# Altium PCB MB1814.PcbDoc (part 6 of 6)
Units mm, origin at the board's own origin, x right, y up, seen from the top; angles counter-clockwise.
Board outline 70 x 82.5 mm, 4 copper layers (Top Layer, Signal Layer 1, Signal Layer 2, Bottom Layer), stack 1.614 mm thick; 207 components, 155 nets, 901 pads, 710 vias.
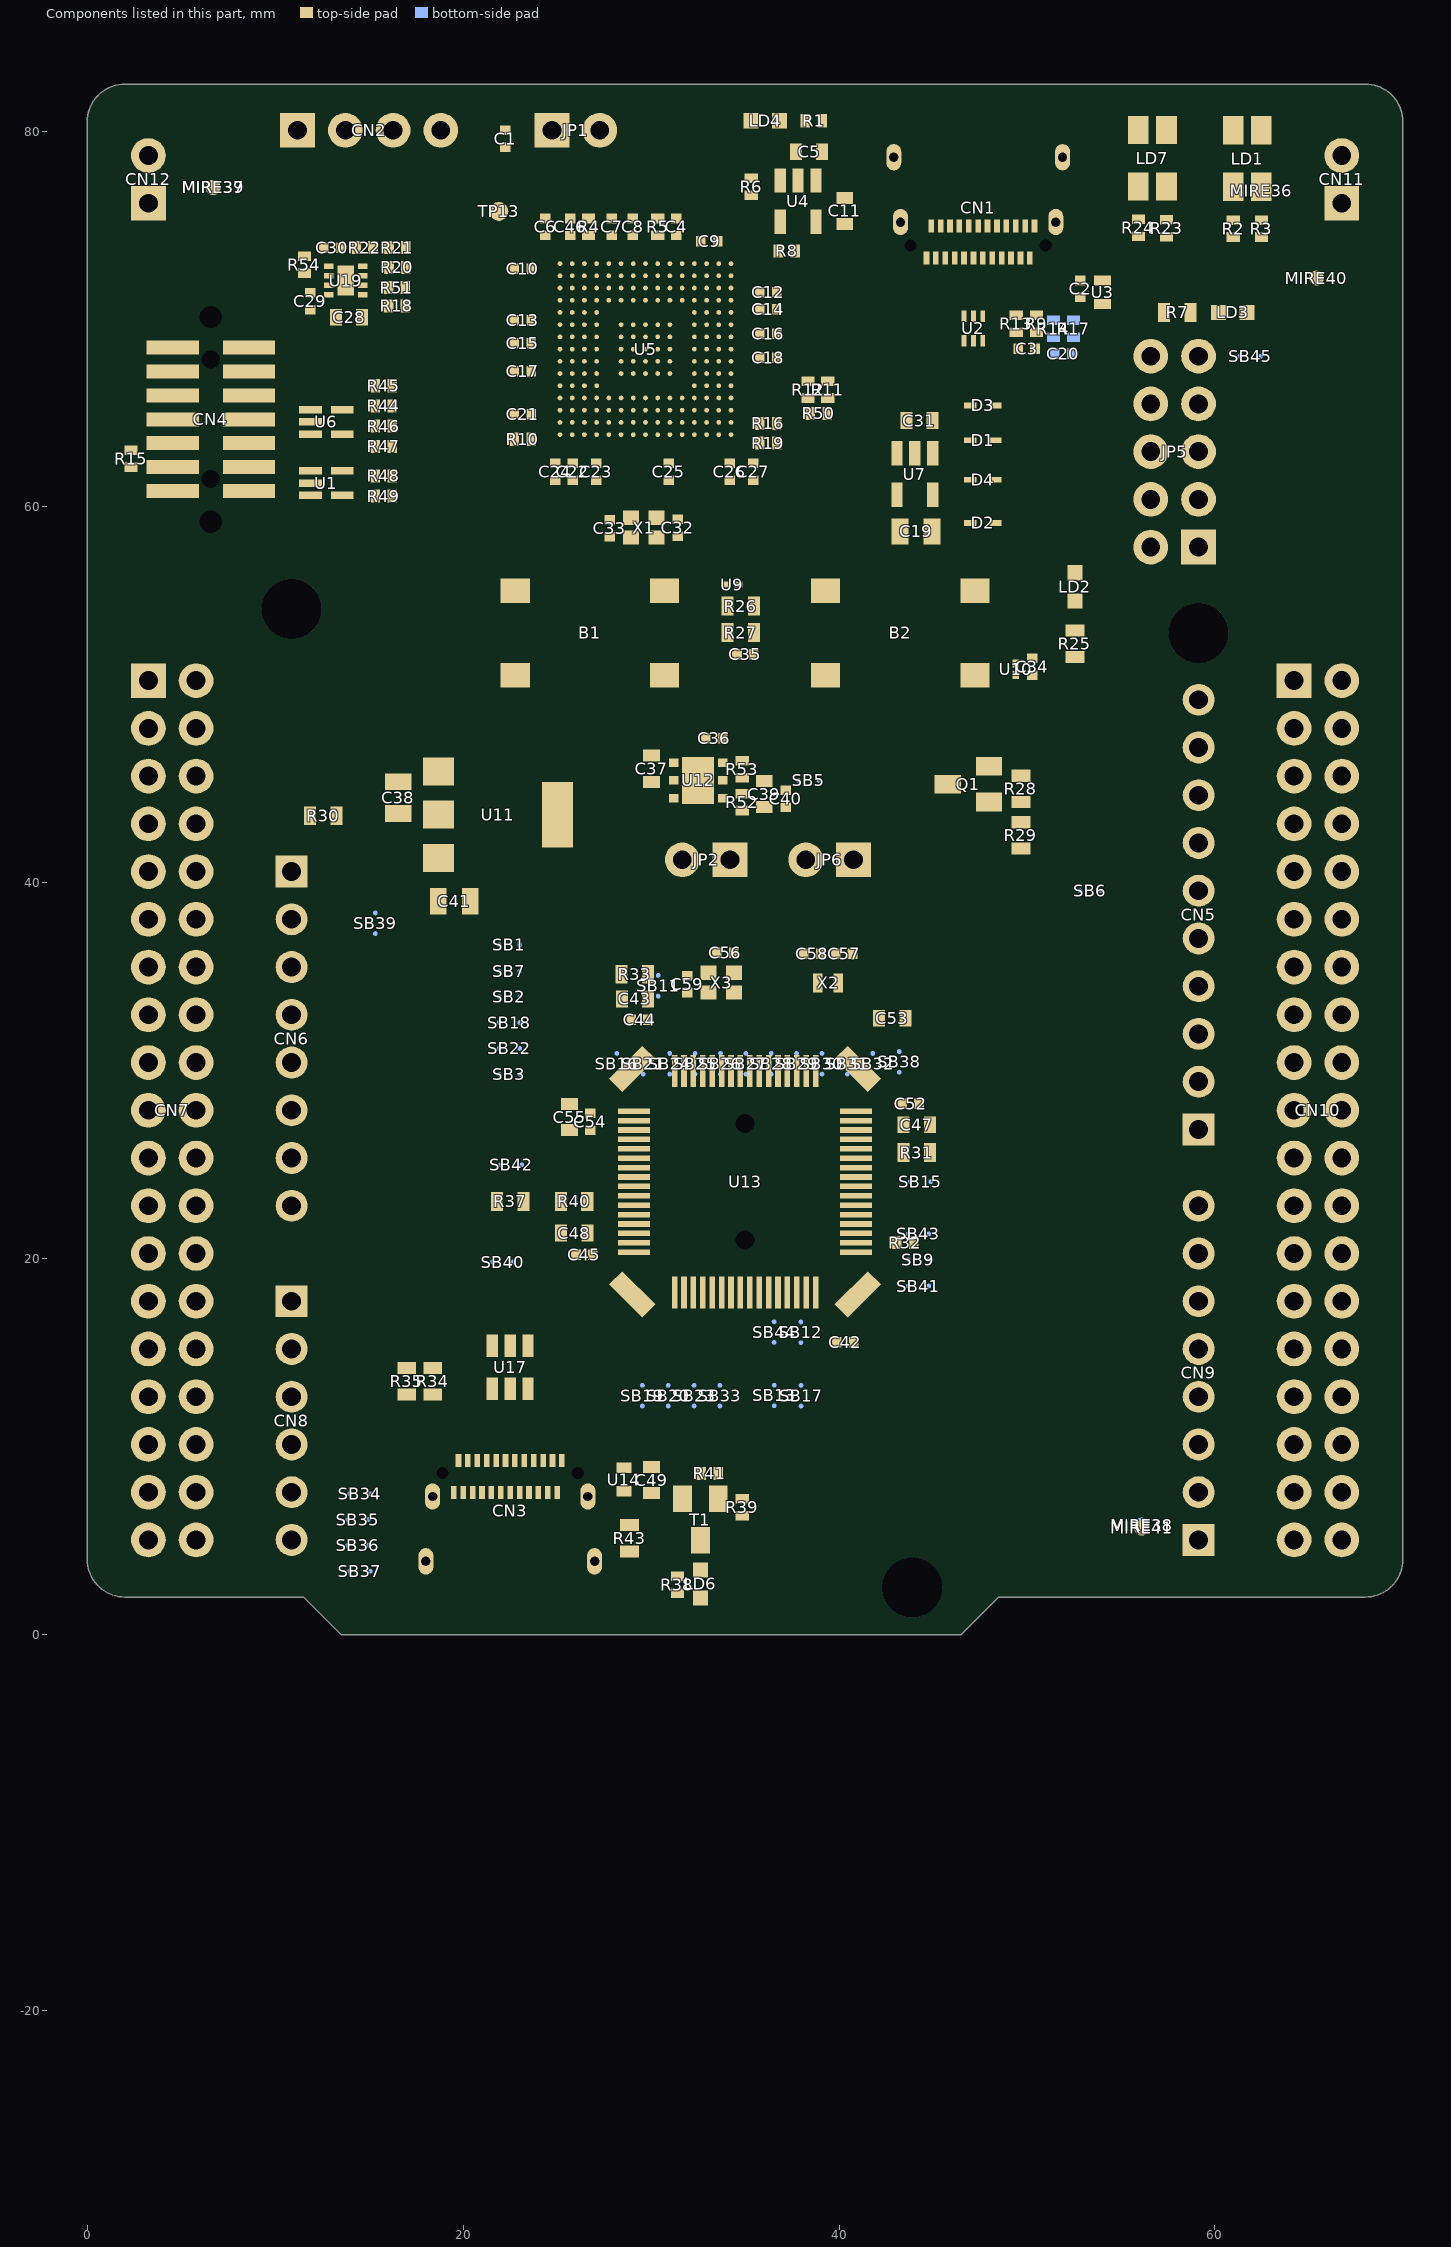
[diagram p6: the components of this part, seen from the top]

## Via types
v1: diameter 0.45, hole 0.2, Top Layer to Bottom Layer, tented both sides, 696 vias
v2: diameter 0.45, hole 0.2, Top Layer to Bottom Layer, 14 vias

## Nets (pads, with @x,y where several pads share a name; then routed paths per layer and width w, separated by ;. In a path a pad name is that pad's centre, name@x,y a point inside that pad or via, vN(x,y) a via of type N, cw(c..) or ccw(c..) an arc to the next point about the centre after c; other vN are vias at no path point) (continued)
pads on no net: CN1.0 CN1.A2 CN1.A3 CN1.A8 CN1.A10 CN1.A11 CN1.B2 CN1.B3 CN1.B8 CN1.B10 CN1.B11 CN3.0 CN3.A2 CN3.A3 CN3.A8 CN3.A10 CN3.A11 CN3.B2 CN3.B3 CN3.B8 CN3.B10 CN3.B11 CN4.0 CN4.1 CN4.2 CN4.9 CN7.9 CN7.10 CN7.11 CN7.21 CN7.26 CN10.1 CN10.10 CN10.18 CN10.24 CN10.38 MIRE36.1 MIRE37.1 MIRE38.1 MIRE39.1 MIRE40.1 MIRE41.1 U1.4 U2.4 U5.A1 U5.A2 U5.A3 U5.A4 U5.A5 U5.A8 U5.A9 U5.A11 U5.A12 U5.A13 U5.B1 U5.B2 U5.B3 U5.B4 U5.B5 U5.B6 U5.B7 U5.B8 U5.B9 U5.B10 U5.B11 U5.B12 U5.B14 U5.B15 U5.C2 U5.C3 U5.C4 U5.C12 U5.C13 U5.C14 U5.C15 U5.D1 U5.D2 U5.D3 U5.D11 U5.D13 U5.D14 U5.E1 U5.E2 U5.E3 U5.E4 U5.E12 U5.E13 U5.E14 U5.E15 U5.F1 U5.F4 U5.F14 U5.G4 U5.G14 U5.G15 U5.H2 U5.H3 U5.H4 U5.H14 U5.J2 U5.J3 U5.J4 U5.K1 U5.K2 U5.K3 U5.K12 U5.K13 U5.K14 U5.K15 U5.L1 U5.L12 U5.L13 U5.L14 U5.L15 U5.M2 U5.M3 U5.M4 U5.M7 U5.M12 U5.M13 U5.M14 U5.M15 U5.N2 U5.N4 U5.N6 U5.N7 U5.N11 U5.N13 U5.N14 U5.N15 U5.P2 U5.P4 U5.P5 U5.P6 U5.P7 U5.P8 U5.P9 U5.P10 U5.P11 U5.P12 U5.P13 U5.P14 U5.P15 U5.R2 U5.R3 U5.R6 U5.R7 U5.R8 U5.R9 U5.R10 U5.R11 U5.R12 U5.R13 U7.4 U12.3 U13.0 U17.5
copper on no net:
  other v1: 14.141,45.084

## Polygon pours and split planes (outlines as drawn)
GND on Top Layer "GND" (solid, remove dead copper, pour order 140): 68.35,84.554 70.075,82.829 70.075,2.304 66.75,-1.021 0.825,-1.021 -1.925,1.729 -1.925,82.229 0.4,84.554
5V_STLK on Top Layer "5V_STLK_L01_P112" (solid, remove dead copper, pour order 112): 40.2,77.623 39.601,77.024 39.077,76.5 38.391,76.5 38.325,76.566 38.325,79.283 38.582,79.54 40.2,79.54
NetC39_2 on Top Layer "NO_FT" (solid, pour order 127): 33.3,43.9 33.85,43.35 38.475,43.35 38.75,43.625 38.75,44.35 38.375,44.725 34.45,44.725 34.225,44.95 33.375,44.95 33.3,44.875
no net on Top Layer "NO_FT" (solid, pour order 113): 37.05,6.475 37.25,6.675 37.25,8.05 36.975,8.325 35.8,8.325 35.425,7.95 35.425,6.6 35.55,6.475
5V_VIN on Top Layer "5V_VIN" (solid, remove dead copper, pour order 138): 60.35,61.7 60.825,61.225 60.825,59.375 60.077,58.627 56.452,58.627 56.1,58.275 47.875,58.275 47.65,58.5 47.65,59.65 48.175,60.175 56.9,60.175 58.425,61.7
E5V on Top Layer "E5V_L01_P137" (solid, remove dead copper, pour order 137): 60.875,62.475 60.225,61.825 58.275,61.825 56.75,60.3 48.4,60.3 47.8,60.9 47.8,61.975 48.35,62.525 56.525,62.525 58.475,64.475 60.575,64.475 60.875,64.175
VBUS_STLK on Top Layer "VBUS_STLK_L01_P136" (solid, remove dead copper, pour order 136): 48.075,64.525 47.8,64.25 47.8,63.2 48.2,62.8 56.375,62.8 58.325,64.75 60.55,64.75 60.875,65.075 60.875,66.775 60.725,66.925 58.7,66.925 56.825,65.05 54.425,65.05 53.9,64.525
VBUS_STLK on Top Layer "VBUS_STLK" (solid, remove dead copper, pour order 132): 13.15,71.8 13.15,71.15 12.95,70.95 10.85,70.95 10.8,71 10.8,71.825 11.025,72.05 13.075,72.05 13.15,71.975
5V_STLK on Top Layer "5V_STLK" (solid, remove dead copper, pour order 131): 14.325,71.575 14.975,71.575 15.25,71.3 15.25,69.125 15.125,69 14.028,69 13.951,69.077 13.951,70.776 14.25,71.075 14.25,71.5
VBUS_STLK on Top Layer "VBUS_STLK" (solid, remove dead copper, pour order 130): 38.267,76.02 39.28,76.02 39.7,75.6 41.525,75.6 41.775,75.35 41.775,74.325 41.325,73.875 38.46,73.875 38.166,74.169 38.166,75.919
5V on Top Layer "5V_L01_P032" (solid, remove dead copper, pour order 32): 59.775,69.638 58.463,69.638 56.575,67.75 54.65,67.75 53.625,66.725 49.675,66.725 49.2,66.25 39.175,66.25 39.025,66.4 39.025,67.625 39.175,67.775 48.2,67.775 49.425,69 50.175,69 53.075,71.9 59.525,71.9 59.775,71.65
3V3_STLK on Top Layer "3V3_STLK" (solid, remove dead copper, pour order 129): 45.525,65.875 45.825,65.575 45.825,62.688 45.262,62.125 44.675,62.125 44.455,62.345 44.455,65.755 44.575,65.875
NetC19_2 on Top Layer "NetC19_2" (solid, remove dead copper, pour order 128): 47.259,66.025 47.448,65.836 47.448,58.223 47.05,57.825 44.38,57.825 44.175,58.03 44.175,60.975 43.6,61.55 42.9,61.55 42.425,62.025 42.425,63.545 42.58,63.7 43.425,63.7 43.55,63.575 43.55,62.299 43.903,61.946 45.371,61.946 46.05,62.625 46.05,65.9 46.175,66.025
5V on Top Layer "NO_FT" (solid, pour order 121): 34.6,46.875 33.863,46.875 33.4,47.4 33.4,48.1 33.5,48.2 34.6,48.2 34.849,47.951 34.849,47.124
GND on Top Layer "NO_FT" (solid, remove dead copper, pour order 8): 20.625,45.025 20.35,44.75 16.15,44.75 15.875,45.025 15.875,48.2 16.275,48.6 20.275,48.6 20.625,48.25
5V_VIN on Top Layer "NO_FT" (solid, remove dead copper, pour order 6): 12.725,42.375 12.35,42.75 12.35,44.025 12.825,44.5 16.3,44.5 20.4,44.5 21,45.1 21,46.925 21.425,47.35 26.8,47.35 27.3,46.85 27.3,40.7 26.725,40.125 21.7,40.125 21.225,40.6 21.225,41.825 20.675,42.375
VBUSC on Top Layer "VBUSC_L01_P078" (solid, remove dead copper, pour order 78): 49.5,66.375 49.25,66.125 48.1,66.125 47.8,65.825 47.8,65.1 48.1,64.8 53.775,64.8 54.392,65.417 56.592,65.417 58.3,67.125 60.65,67.125 60.9,67.375 60.9,69.25 60.725,69.425 58.775,69.425 56.725,67.375 54.575,67.375 53.75,66.55 49.675,66.55
VIN on Top Layer "NO_FT" (solid, remove dead copper, pour order 28): 20.5,42.125 20.625,42 20.625,38.025 20.35,37.75 17.1,37.75 16.75,38.1 16.75,41.85 17.025,42.125
GND on Bottom Layer "GND" (solid, remove dead copper, pour order 141): 68.45,84.375 70.175,82.65 70.175,2.125 66.85,-1.2 0.925,-1.2 -1.825,1.55 -1.825,82.05 0.5,84.375
5V_STLK on Bottom Layer "Bottom Layer-5V_STLK" (solid, remove dead copper, pour order 14): 39.6,78 41.85,75.75 52.9,75.75 58.25,70.4 63.175,70.4 64.225,69.35 64.225,62.5 61.575,59.85 58.999,59.85 58.5,59.351 58.5,56.5 58.725,56.275 65.3,56.275 67.975,58.95 67.975,69.625 63.95,73.65 63.936,73.65 59.536,78.05 42.75,78.05 41.6,79.2 39.8,79.2 39.6,79
VBUS_STLK on Bottom Layer "VDDIO1_4_L01_P-001" (solid, remove dead copper, pour order 34): 41.5,81.2 38.5,81.2 37.15,79.85 37.15,74.9 38.25,73.8 41.45,73.8 41.7,74.05 41.7,75.65 39.4,77.95 39.4,79 39.8,79.4 40.9,79.4 41.5,80
NetC49_2 on Bottom Layer "USB_VBUS" (solid, remove dead copper, pour order 126): 44.125,9.075 44.125,8.25 41.675,5.8 34.51,5.8 33.435,6.875 28.55,6.875 27.325,8.1 27.325,9.1 27.585,9.36 33.728,9.36 34.246,8.842 34.246,8.241 35.056,7.431 38.806,7.431 40.675,9.3 43.9,9.3
no net on Bottom Layer "NO_FT" (solid, pour order 80): 34.45,9.375 34.525,9.45 35.85,9.45 36.975,8.325 36.975,7.75 36.8,7.575 35.2,7.575 34.45,8.325
5V_VIN on Bottom Layer "5V_VIN" (solid, remove dead copper, pour order 133): 49.8,60.175 49.525,59.9 49.525,58.475 49.75,58.275 56.1,58.275 56.452,58.627 60.077,58.627 60.825,59.375 60.825,61.225 60.35,61.7 58.425,61.7 56.9,60.175
E5V on Bottom Layer "E5V_L04_P040" (solid, remove dead copper, pour order 40): 49.75,62.525 49.45,62.225 49.45,60.6 49.775,60.3 56.75,60.3 58.275,61.825 60.225,61.825 60.875,62.475 60.875,64.175 60.575,64.475 58.475,64.475 56.525,62.525
VBUS_STLK on Bottom Layer "VBUS_STLK_L04_P038" (solid, remove dead copper, pour order 38): 49.7,64.525 49.4,64.225 49.4,63.075 49.7,62.8 56.375,62.8 58.325,64.75 60.55,64.75 60.875,65.075 60.875,66.775 60.725,66.925 58.7,66.925 56.825,65.05 54.425,65.05 53.9,64.525
NetC49_2 on Bottom Layer "USB_VBUSC" (solid, remove dead copper, pour order 139): 62.325,68.525 62.575,68.775 63.975,68.775 64.05,68.7 64.05,67.6 63.8,67.35 62.5,67.35 62.325,67.525
3V3_STLK on Bottom Layer "3V3_STLK" (solid, remove dead copper, pour order 134): 10.225,80.95 20.625,80.95 24.505,77.07 24.505,74.332 23.963,73.79 22.71,73.79 21.225,75.275 21.225,76.154 19.779,77.6 10.275,77.6 9.55,78.325 9.55,80.275
3V3 on Bottom Layer "3V3_L04_P124" (solid, remove dead copper, pour order 124): 2.95,69.3 2.195,68.545 2.195,66.83 3.612,65.413 3.612,59.862 1.225,57.475 1.225,32.625 1.85,32 11.3,32 11.3,32.025 11.875,32.6 11.875,58 9.675,60.2 9.675,68.65 9.025,69.3
3V3 on Bottom Layer "3V3_L04_P110" (solid, remove dead copper, pour order 110): 38.625,54.825 39.35,54.1 53.575,54.1 54.8,52.875 54.8,50.7 53.95,49.85 43.575,49.85 42.15,48.425 42.15,39.95 41.275,39.075 39.25,39.075 38.625,39.7 36.437,41.887 36.437,58.337 36.5,58.4 36.5,63.4 36.875,63.775 38.3,63.775 38.625,63.45
NetC39_2 on Bottom Layer "NO_FT" (solid, pour order 36): 38.05,44.8 38.35,44.5 38.65,44.5 38.95,44.2 38.95,43.825 38.675,43.55 36.95,43.55 36.437,44.063 36.437,45.975 37.9,45.975 38.05,45.825
5V_VIN on Bottom Layer "5V_VIN_L04_P108" (solid, remove dead copper, pour order 108): 21.5,47.5 20.375,46.375 20.375,40.47 20.72,40.125 26.575,40.125 26.92,40.47 26.92,47.23 26.65,47.5
GND on Signal Layer 2 "GND" (solid, remove dead copper, pour order 125): 68.45,84.375 70.175,82.65 70.175,2.125 66.85,-1.2 0.925,-1.2 -1.825,1.55 -1.825,82.05 0.5,84.375
3V3_STLK on Signal Layer 2 "3V3_STLK_L03_P020" (solid, remove dead copper, pour order 20): 33.025,74.925 32.6,75.35 23.7,75.35 21.675,73.325 21.65,63.575 23.75,61.475 36.05,61.475 36.35,61.775 36.35,63.475 36.8,64 44.7,64 46.075,65.375 46.075,68 42.9,71.175 40.825,71.175 40.075,71.925 40.075,75.6 43.15,78.675 59.754,78.675 60.174,79.095 60.174,80.963 59.762,81.375 40.075,81.375 37.125,78.425 37.125,72.65 36.025,71.55 35.2,71.55 34.025,72.725 33.425,72.725 33.025,73.125
VBUS_STLK on Signal Layer 2 "VBUS_STLK_L03_P024" (solid, remove dead copper, pour order 24): 60.975,65 61.55,65.575 61.55,68.85 62.325,69.625 63.9,69.625 64.675,68.85 64.675,65 64.675,42.7 65.825,41.55 68.275,41.55 68.875,42.15 68.875,71.45 61.8,78.525 43.4,78.525 40.25,75.375 40.25,72 40.875,71.375 43.025,71.375 49.375,65.025 49.375,62.875 49.5,62.75 52.1,62.75 52.375,63.025 52.375,70.275 52.75,70.65 57.575,70.65 58,70.225 58,65
NetC49_2 on Signal Layer 2 "USB_VBUS" (solid, pour order 115): 20.8,5.15 19.225,5.15 16.925,7.45 16.925,19.5 18.5,19.5 28.5,9.5 31.45,9.5 35.175,5.775 35.175,5.575 34.75,5.15
5V on Signal Layer 2 "5V_L03_P030" (solid, remove dead copper, pour order 30): 40.075,3.7 40.075,4.05 39.1,5.025 39.1,10.175 43,14.075 43,23.875 45.65,26.525 45.65,40.825 43.625,42.9 30.25,42.9 29.45,43.7 29.45,47.225 30.575,48.35 51.75,48.35 52.925,49.525 52.925,70.025 52.9,70.05 53.1,70.25 57.325,70.25 57.625,69.95 57.625,69.25 57.62,68.575 58.15,68.025 58.15,55.775 56.975,54.6 56.975,36.625 53.725,33.375 53.725,19.65 42.8,8.725 42.8,4.05 39.925,1.175 16.875,1.175 12.5,5.55 12.5,26.725 10.5,28.725 5.325,28.725 4.825,29.225 4.825,31.125 5.727,32.027 13.958,32.027 16.8,29.185 16.8,7.325 19.1,5.025 29.275,5.025 31.775,2.525 38.9,2.525
VDD_MCU on Signal Layer 2 "VDD_MCU" (solid, pour order 116): 28.325,39 28.325,28.075 27.54,27.29 25.79,27.29 25.075,26.575 25.075,21.9 32.475,14.5 40.15,14.5 40.55,14.9 40.55,24.775 43.2,27.425 43.2,29.035 42.71,29.525 36.6,29.525 33.275,32.85 33.275,42.183 32.862,42.595 31.92,42.595
3V3 on Signal Layer 2 "3V3" (solid, pour order 119): 29.976,5.025 29.876,4.925 29.876,3.302 30.653,2.525 38.694,2.525 38.975,2.806 38.975,3.35 37.75,4.575 37.75,7.275 35.4,9.625 35.4,14.3 32.675,14.3 24.9,22.075 24.9,31.375 18.775,37.5 14.925,37.5 11.675,34.25 5.51,34.25 4.7,33.44 4.7,32.325 4.975,32.05 14.025,32.05 17,29.075 17,21.5 28.8,9.7 31.6,9.7 35.4,5.9 35.4,5.5 34.925,5.025
E5V on Signal Layer 2 "E5V_L03_P062" (solid, remove dead copper, pour order 62): 49.474,60.399 52.099,60.399 52.325,60.625 52.325,62.325 52.1,62.55 45.425,62.55 37.275,54.4 25.25,54.4 24.625,53.775 24.625,50.85 24.025,50.25 8.225,50.25 4.625,46.65 4.625,44 6.225,42.4 13.025,42.4 15.925,45.3 18.375,45.3 20.625,47.55 24,47.55 27.95,51.5 40.575,51.5
NetC49_2 on Signal Layer 2 "USB_VBUS" (solid, remove dead copper, pour order 122): 64.113,69.287 63.95,69.45 62.35,69.45 61.675,68.775 61.675,65.35 61.075,64.75 58.294,64.75 58.294,55.631 57.163,54.5 57.163,36.547 53.912,33.296 53.912,19.637 42.875,8.6 42.875,8.1 60.1,8.1 62.925,10.925 62.925,52.01 64.6,53.685 64.6,68.8
3V3 on Signal Layer 2 "3V3_L03_P052" (solid, remove dead copper, pour order 52): 2.975,69.8 2.25,69.075 2.25,66.875 3.05,66.075 12.475,66.075 23.975,54.575 36.75,54.575 38.625,56.45 38.625,63.5 38.3,63.825 36.925,63.825 36.575,63.475 36.575,58.2 35.05,56.675 26.525,56.675 13.4,69.8
VDD on Signal Layer 2 "VDD" (solid, pour order 117): 40.675,14.76 40.165,14.25 35.575,14.25 35.575,9.725 37.87,7.43 37.87,4.755 39.05,3.575 39.625,3.575 39.875,3.825 39.875,4.15 38.95,5.075 38.95,10.3 42.7,14.05 42.7,23.7 45.425,26.425 45.425,30.4 43.8,32.025 41.05,32.025 39.35,33.725 39.35,42.8 33.071,42.8 33.069,42.389 33.069,33.356 36.69,29.735 42.615,29.735 43.425,28.925 43.425,27.073 40.675,24.323
VDD on Signal Layer 2 "VDD_L03_P058" (solid, remove dead copper, pour order 58): 23.975,50.575 24.025,50.575 24.4,50.95 24.4,53.9 18.575,59.725 1.625,59.725 1.225,59.325 1.225,44.025 3.925,44.025 4.25,44.35 4.25,46.775 8.05,50.575
5V_VIN on Signal Layer 2 "5V_VIN_L03_P016" (solid, remove dead copper, pour order 16): 20.4,47.1 20.4,43.2 20.8,42.8 24.925,42.8 30.663,48.538 51.488,48.538 52.35,49.4 52.35,59.75 52.05,60.05 49.9,60.05 41.2,51.35 28.075,51.35 24.1,47.375 20.675,47.375
VIN on Signal Layer 2 "VIN" (solid, pour order 118): 18.64,37.965 18.025,37.35 14.7,37.35 11.575,34.225 5.775,34.225 4.65,33.1 4.65,25.25 5.45,24.45 12.15,24.45 12.425,24.175 12.425,21.875 11.645,21.095 1.68,21.095 1.2,21.575 1.2,36.01 4.265,39.075 15.575,39.075 16.55,40.05 18.395,40.05 18.64,39.805
GND on Signal Layer 2 "GND_L03_P026" (solid, remove dead copper, pour order 26): 56.825,82.35 58.15,81.025 58.15,79.375 58.6,78.925 62,78.925 69.425,71.5 69.9,71.5 69.9,81.45 69,82.35
GND on Signal Layer 1 "GND" (solid, remove dead copper, pour order 120): 68.45,84.375 70.175,82.65 70.175,2.125 66.85,-1.2 0.925,-1.2 -1.825,1.55 -1.825,82.05 0.5,84.375

## Other copper
Top Layer:
  pour cut-out: 28.4,64.5 28.28,64.38 28.28,60.48 27.73,60.48 26.975,59.725 26.975,57.5 31.925,57.5 32.334,57.909 32.325,57.918 32.325,60.2 30.45,60.2 29.875,60.775 29.875,63.81 29.195,64.49
  text "1" at 46.875,5.2 h2.5
  text ".Layer_Name" at -0.272,-22.558 h3
  text ".GTL" at 41.423,-22.558 h3
Signal Layer 1:
  text "2" at 48.625,5.2 h2.5
  text ".Layer_Name" at -0.272,-22.558 h3
  text ".G1" at 41.423,-22.558 h3
Signal Layer 2:
  text "3" at 51.625,5.2 h2.5
  text ".Layer_Name" at -0.272,-22.558 h3
  text ".G2" at 41.423,-22.558 h3
Bottom Layer:
  text "4" at 53.625,5.2 h2.5
  text ".GBL" at 30.22,-22.59 h3
  text ".Layer_Name" at 71.534,-22.59 h3
Multi-Layer:
  pour cut-out: 46.125,7.4 46.125,4.4 54.625,4.4 54.625,7.4

## Silkscreen, mask and mechanical layers (free items; w line width, h text height)
Top Overlay:
  lines w0.076: 12.394,3.77 14.934,3.77 14.934,9.8 ; 12.394,19.01 14.934,19.01 14.934,12.85 ; 12.394,21.55 16.204,21.55 16.204,25.614 ; 12.394,33.996 16.204,33.996 16.204,31.6
  lines w0.12: 16,1.2 16,5.65 17.425,5.65 17.425,1.2 16,1.2
  text "STLK" at 28.975,80.3 h1.5
  text "RST" at 29,78.975 h1.5
  text "RESERVED" at 11.35,77.425 h1.5
  text "PWR" at 54.675,76.85 h1.7 r90
  text "COM" at 59.9,76.825 h1.7 r90
  text "USB_STLK" at 42.325,73.925 h1.7 r90
  text "GND" at 65.175,73.425 h1.7
  text "GND" at 1.625,73.375 h1.7
  text "VBUSC" at 61.475,67.535 h1.5
  text "VBUS_STLK" at 61.475,64.985 h1.5
  text "E5V" at 61.475,62.485 h1.5
  text "5V_VIN" at 61.475,59.91 h1.5
  text "5V_STLK" at 61.475,57.325 h1.5
  text "DEBUG" at 3.5,56.625 h2
  text "5V_SEL" at 55.3,55.225 h1.7
  text "L" at 13.15,49.775 h13
  text "SCL/D15" at 51.625,49.25 h1.7
  text "USER" at 24.25,48.625 h2
  text "RESET" at 40.425,48.55 h2
  text "SDA/D14" at 51.525,46.625 h1.7
  text "E5V" at 7.47,45.115 h1.7
  text "VREFP" at 52.65,44.1 h1.7
  text "GND" at 7.314,42.632 h1.7
  text "GND" at 54.475,41.525 h1.7
  text "IDD" at 26.725,40.6 h2
  text "SCK/D13" at 51.475,39 h1.7
  text "3V3" at 12.394,37.552 h1.7
  text "MISO/D12" at 50.775,36.55 h1.7
  text "NRST" at 12.394,34.758 h1.7
  text "PWM/MOSI/D11" at 46.8,33.975 h1.7
  text "3V3" at 12.394,32.472 h1.7
  text "PWM/CS/D10" at 48.425,31.475 h1.7
  text "5V" at 12.394,29.678 h1.7
  text "PWM/D9" at 51.75,28.875 h1.7
  text "GND" at 12.25,27.275 h1.7
  text "D8" at 55.875,26.3 h1.7
  text "POWER" at 16.775,25.875 h1.7 r90
  text "GND" at 12.394,24.598 h1.7
  text "D7" at 55.9,22.325 h1.7
  text "VIN" at 12.394,22.058 h1.7
  text "PWM/D6" at 52.15,19.725 h1.6
  text "PWM/D5" at 51.775,17.2 h1.7
  text "A0" at 12.394,16.978 h1.7
  text "D4" at 55.9,14.675 h1.7
  text "A1" at 12.394,14.438 h1.7
  text "PWM/D3" at 51.8,12.075 h1.7
  text "A2" at 12.394,11.898 h1.7
  text "J" at 42.2,10.125 h15
  text "AIN" at 15.55,10.025 h1.7 r90
  text "D2" at 55.875,9.575 h1.7
  text "A3" at 12.394,9.358 h1.7
  text "MB1814C" at 41.85,8.825 h2.5
  text "TX/D1" at 53.6,7.55 h1.7
  text "A4" at 12.394,6.818 h1.7
  text "A5" at 12.394,4.278 h1.7
  text "RX/D0" at 53.3,3.25 h1.7
  text "USER" at 17.275,1.4 h1.7 r90
  text ".Layer_Name" at -0.272,-22.558 h3
  text ".GTO" at 41.423,-22.558 h3
Bottom Overlay:
  drawing of 346 lines, arcs and shapes, not listed
  text "CN12" at 5.8,80.45 h2
  text "CN11" at 68.7,80.375 h2
  text "1" at 9.575,79.417 h2
  text "1" at 29.425,79.417 h2
  text "CN2" at 16.85,77.1 h2
  text "JP1" at 27.45,77.1 h2
  text "CN1" at 48.925,76.725 h2
  text "1" at 65.075,75.492 h2
  text "1" at 5.525,75.417 h2
  text "SN" at 23.85,72.675 h1.5
  text "CN4" at 8.275,71.25 h2
  text "JP5" at 59.35,70.125 h2
  text "2" at 10.425,67.867 h2
  text "1" at 3.6,67.8 h2
  text "13" at 3.575,60.225 h2
  text "14" at 11.225,60.225 h2
  text "1" at 61.25,57.225 h2
  text "G" at 23.225,57.025 h8
  text "E" at 54.4,57 h8
  text "F" at 29.225,56.95 h9
  text "S" at 16.35,56.85 h7
  text "C" at 35.5,56.8 h7.5
  text "I" at 39.025,56.675 h7
  text "H" at 49.125,55.775 h15
  text "CN7" at 6.25,52.375 h2
  text "CN10" at 67.675,52.3 h2
  text "1" at 1.98,50.252 h2
  text "2" at 68.93,50.127 h2
  text "10" at 62.201,49.059 h2
  text "3" at 1.98,47.712 h2
  text "4" at 68.93,47.587 h2
  text "9" at 61.312,46.519 h2
  text "5" at 1.98,45.172 h2
  text "6" at 68.93,45.047 h2
  text "CPN" at 25.325,44.3 h1.5
  text "8" at 61.312,43.979 h2
  text "7" at 1.98,42.632 h2
  text "8" at 68.93,42.507 h2
  text "CN6" at 12.675,42.35 h2
  text "7" at 61.312,41.439 h2
  text "JP6" at 45.875,40.825 h2
  text "JP2" at 29.525,40.8 h2
  text "9" at 1.98,40.092 h2
  text "1" at 9.6,40.092 h2
  text "10" at 69.692,39.967 h2
  text "1" at 40.275,39 h2 r270
  text "1" at 33.65,38.92 h2 r270
  text "6" at 61.312,38.899 h2
  text "11" at 1.98,37.552 h2
  text "2" at 9.6,37.552 h2
  text "12" at 69.692,37.427 h2
  text "5" at 61.312,36.359 h2
  text "13" at 1.98,35.012 h2
  text "3" at 9.6,35.012 h2
  text "14" at 69.692,34.887 h2
  text "CN5" at 56.4,34.15 h2 r270
  text "4" at 61.312,33.819 h2
  text "15" at 1.98,32.472 h2
  text "4" at 9.6,32.472 h2
  text "16" at 69.692,32.347 h2
  text "3" at 61.312,31.279 h2
  text "17" at 1.98,29.932 h2
  text "5" at 9.6,29.932 h2
  text "18" at 69.692,29.807 h2
  text "2" at 61.312,28.739 h2
  text "19" at 1.98,27.392 h2
  text "6" at 9.6,27.392 h2
  text "20" at 69.819,27.267 h2
  text "1" at 60.931,26.199 h2
  text "21" at 1.98,24.852 h2
  text "7" at 9.6,24.852 h2
  text "22" at 69.819,24.727 h2
  text "23" at 1.98,22.312 h2
  text "8" at 9.6,22.312 h2
  text "24" at 69.819,22.187 h2
  text "8" at 61.312,22.135 h2
  text "25" at 1.98,19.772 h2
  text "26" at 69.819,19.647 h2
  text "7" at 61.312,19.595 h2
  text "CN8" at 12.525,19.525 h2
  text "27" at 1.98,17.232 h2
  text "1" at 9.6,17.232 h2
  text "28" at 69.819,17.107 h2
  text "6" at 61.312,17.055 h2
  text "29" at 1.98,14.692 h2
  text "2" at 9.6,14.692 h2
  text "30" at 69.819,14.567 h2
  text "5" at 61.312,14.515 h2
  text "31" at 1.98,12.152 h2
  text "3" at 9.6,12.152 h2
  text "32" at 69.819,12.027 h2
  text "4" at 61.312,11.975 h2
  text "CN9" at 56.25,11.675 h2 r270
  text "33" at 1.98,9.612 h2
  text "4" at 9.6,9.612 h2
  text "34" at 69.819,9.487 h2
  text "3" at 61.312,9.435 h2
  text "35" at 1.98,7.072 h2
  text "5" at 9.6,7.072 h2
  text "36" at 69.819,6.947 h2
  text "2" at 61.312,6.895 h2
  text "CN3" at 24.2,5.4 h2
  text "37" at 1.98,4.532 h2
  text "6" at 9.6,4.532 h2
  text "38" at 69.819,4.407 h2
  text "1" at 60.931,4.355 h2
  text ".GBO" at 30.22,-22.59 h3
  text ".Layer_Name" at 71.534,-22.59 h3
Top Paste:
  text ".Layer_Name" at -0.299,-22.548 h3
  text ".GTP" at 41.396,-22.548 h3
Bottom Paste:
  text ".GBP" at 30.111,-22.575 h3
  text ".Layer_Name" at 71.425,-22.575 h3
Top Solder:
  rectangle: 46.375,4.7 54.375,7.2
  text ".Layer_Name" at -0.274,-22.623 h3
  text ".GTS" at 41.421,-22.623 h3
Bottom Solder:
  rectangle: 46.375,4.7 54.375,7.2
  text ".GBS" at 30.136,-22.65 h3
  text ".Layer_Name" at 71.45,-22.65 h3
M1-Board Shape:
  lines w0.1: 48.5,2 46.5,0 13.5,0 11.5,2 2,2 cw(c2,4) 0,4 0,58 0,80.5 cw(c2,80.5) 2,82.5 68,82.5 cw(c68,80.5) 70,80.5 ; 48.5,2 48.5,2 ; 48.5,2 68,2 ccw(c68,4) 70,4 70,58 70,80.5 ; 70,80.5 70,80.5
M2-Board Dimensions:
  text ".Layer_Name" at -0.272,-22.558 h3
  text ".GM2" at 41.423,-22.558 h3
M14-Top Assembly:
  text ".Layer_Name" at -0.272,-22.558 h3
  text ".GM14" at 41.423,-22.558 h3
M15-Bottom Assembly:
  text ".GM15" at 30.22,-22.59 h3
  text ".Layer_Name" at 71.534,-22.59 h3
Drill Drawing:
  drawing of 367 lines, arcs and shapes, not listed
  text "« THE COMPONENTS WITH PLATED THROUGH HOLE (PTH) MAY BE WELDED (CABLED) IN \"PIN-IN-PASTE\" MODE (IF NECESSARY) »" at 16.925,136.875 h3.5
  text "PCB SPECIFICATIONS :" at 0.67,130.815 h3
  text "**Plating type :" at 117.72,130.465 h2.5
  text "A.   MATERIAL :" at 0.67,126.815 h3
  text "FR-4" at 39.17,126.815 h3
  text "TG-170" at 55.67,126.815 h3
  text "X  TG-150" at 73.92,126.815 h3
  text "TG-140" at 89.92,126.815 h3
  text "lead Gold" at 124.445,125.99 h2.5
  text "B.   MATERIAL FAMILY :" at 0.67,123.815 h3
  text "N/A" at 39.17,123.815 h3
  text "C.   SOLDERMASK COLOR :" at 0.67,120.815 h3
  text "GREEN" at 39.17,120.815 h3
  text "X  WHITE" at 55.67,120.815 h3
  text "RED" at 73.92,120.815 h3
  text "BLACK" at 89.92,120.815 h3
  text "D.   SILKSCREEN COLOR :" at 0.67,117.815 h3
  text "WHITE" at 39.17,117.815 h3
  text "YELLOW" at 55.67,117.815 h3
  text "BLACK" at 73.92,117.815 h3
  text "X  Blue ink PANTONE 2955" at 89.92,117.815 h3
  text "E.   SURFACE FINISH :" at 0.67,114.815 h3
  text "X  ENIG" at 39.17,114.815 h3
  text "IMMERSION SILVER" at 55.67,114.815 h3
  text "IMMERSION TIN" at 89.92,114.815 h3
  text "HASL" at 39.17,111.815 h3
  text "HASL (PB-FREE)" at 55.67,111.815 h3
  text "GOLDEN FINGER" at 89.92,111.815 h3
  text "F.   IMPEDANCE CONTROL :" at 0.67,108.815 h3
  text "NO" at 39.17,108.815 h3
  text "X  YES  (SEE IMPEDANCE TABLE FOR DETAIL INFORMATION)" at 55.67,108.815 h3
  text "G.   THROUGH VIA :" at 0.67,105.815 h3
  text "PLUG THE VIAS WHICH ARE COVERED WITH SOLDERMASK ONE OR TWO SIDE." at 39.17,105.815 h3
  text "PLUG MATERIAL :" at 39.17,102.815 h3
  text "X  SOLDERMASK" at 64.67,102.815 h3
  text "NON-CONDUCTIVE EPOXY." at 89.92,102.815 h3
  text "H.   STACK-UP :" at 0.67,99.815 h3
  text "SEE LAYER STACK-UP SEQUENCE FOR OVERALL THICKNESS." at 39.17,99.815 h3
  text "Layer" at 79.198,93.05 h2
  text "Name" at 87.572,93.05 h2
  text "Material" at 103.769,93.05 h2
  text "Thickness" at 118.323,93.05 h2
  text "Constant" at 130.278,93.05 h2
  text "Board Layer Stack" at 141.342,93.05 h2
  text "Top Overlay" at 87.572,89.05 h2
  text "PCB : TYPE 3" at 166.351,87.363 h3
  text "Top Solder" at 87.572,85.05 h2
  text "Solder Resist" at 103.769,85.05 h2
  text "0.015mm" at 118.323,85.05 h2
  text "3.5" at 130.278,85.05 h2
  text "ASPECT-RATIO, AXE Z :" at 166.351,81.863 h3
  text "1" at 79.198,81.05 h2
  text "Top Layer" at 87.572,81.05 h2
  text "0.042mm" at 118.323,81.05 h2
  text "Dielectric 1" at 87.572,77.05 h2
  text "PP-IT-180A" at 103.769,77.05 h2
  text "0.106mm" at 118.323,77.05 h2
  text "4.2" at 130.278,77.05 h2
  text "6:1 to 8:1 / LEVEL \"B\"" at 166.37,75.115 h3
  text "2" at 79.196,73.05 h2
  text "Signal Layer 1" at 87.572,73.05 h2
  text "0.035mm" at 118.323,73.05 h2
  text "Dielectric 2" at 87.572,69.05 h2
  text "FR4" at 103.769,69.05 h2
  text "1.248mm" at 118.323,69.05 h2
  text "4.2" at 130.278,69.05 h2
  text "MINIMUM PARAMETERS" at 166.595,65.99 h3
  text "3" at 79.198,65.05 h2
  text "Signal Layer 2" at 87.572,65.05 h2
  text "0.035mm" at 118.323,65.05 h2
  text "Dielectric 3" at 87.572,61.05 h2
  text "PP-IT-180A" at 103.769,61.05 h2
  text "0.106mm" at 118.323,61.05 h2
  text "4.2" at 130.278,61.05 h2
  text "DEFAULT" at 166.595,60.49 h3
  text "4" at 79.198,57.05 h2
  text "Bottom Layer" at 87.572,57.05 h2
  text "0.042mm" at 118.323,57.05 h2
  text "TRACKS : 0.120mm           / GAPS : 0.120mm" at 166.595,54.74 h3
  text "Bottom Solder" at 87.572,53.05 h2
  text "Solder Resist" at 103.769,53.05 h2
  text "0.015mm" at 118.323,53.05 h2
  text "3.5" at 130.278,53.05 h2
  text "Bottom Overlay" at 87.572,49.05 h2
  text "Symbol" at 79.141,34.168 h2.4
  text "Count" at 88.54,34.168 h2.4
  text "Hole Size" at 98.297,34.168 h2.4
  text "Plated" at 117.568,34.168 h2.4
  text "Hole Type" at 125.819,34.168 h2.4
  text "Drill Layer Pair" at 137.831,34.168 h2.4
  text "Via/Pad" at 160.611,34.168 h2.4
  text "Hole Length" at 170.454,34.168 h2.4
  text "Routed Path Length" at 188.731,34.168 h2.4
  text "710" at 88.54,30.025 h2
  text "0.200mm (7.87mil)" at 98.297,30.025 h2
  text "PTH" at 117.568,30.025 h2
  text "Round" at 125.819,30.025 h2
  text "Top Layer - Bottom Layer" at 137.831,30.025 h2
  text "Via" at 160.611,30.025 h2
  text "-" at 170.454,30.025 h2
  text "-" at 188.731,30.025 h2
  text "8" at 88.54,25.882 h2
  text "0.500mm (19.69mil)" at 98.297,25.882 h2
  text "PTH" at 117.568,25.882 h2
  text "Slot" at 125.819,25.882 h2
  text "Top Layer - Bottom Layer" at 137.831,25.882 h2
  text "Pad" at 160.611,25.882 h2
  text "1.100mm (43.31mil)" at 170.454,25.882 h2
  text "0.600mm (23.62mil)" at 188.731,25.882 h2
  text "2" at 88.54,21.738 h2
  text "0.650mm (25.59mil)" at 98.297,21.738 h2
  text "NPTH" at 117.568,21.738 h2
  text "Round" at 125.819,21.738 h2
  text "Top Layer - Bottom Layer" at 137.831,21.738 h2
  text "Pad" at 160.611,21.738 h2
  text "-" at 170.454,21.738 h2
  text "-" at 188.731,21.738 h2
  text "2" at 88.54,17.595 h2
  text "0.650mm (25.59mil)" at 98.297,17.595 h2
  text "NPTH" at 117.568,17.595 h2
  text "Slot" at 125.819,17.595 h2
  text "Top Layer - Bottom Layer" at 137.831,17.595 h2
  text "Pad" at 160.611,17.595 h2
  text "0.950mm (37.40mil)" at 170.454,17.595 h2
  text "0.300mm (11.81mil)" at 188.731,17.595 h2
  text "2" at 88.54,13.452 h2
  text "0.970mm (38.19mil)" at 98.297,13.452 h2
  text "NPTH" at 117.568,13.452 h2
  text "Round" at 125.819,13.452 h2
  text "Top Layer - Bottom Layer" at 137.831,13.452 h2
  text "Pad" at 160.611,13.452 h2
  text "-" at 170.454,13.452 h2
  text "-" at 188.731,13.452 h2
  text "2" at 88.54,9.309 h2
  text "1.000mm (39.37mil)" at 98.297,9.309 h2
  text "NPTH" at 117.568,9.309 h2
  text "Round" at 125.819,9.309 h2
  text "Top Layer - Bottom Layer" at 137.831,9.309 h2
  text "Pad" at 160.611,9.309 h2
  text "-" at 170.454,9.309 h2
  text "-" at 188.731,9.309 h2
  text "C" at 78.353,9.055 h1.84
  text "132" at 88.54,5.166 h2
  text "1.000mm (39.37mil)" at 98.297,5.166 h2
  text "PTH" at 117.568,5.166 h2
  text "Round" at 125.819,5.166 h2
  text "Top Layer - Bottom Layer" at 137.831,5.166 h2
  text "Pad" at 160.611,5.166 h2
  text "-" at 170.454,5.166 h2
  text "-" at 188.731,5.166 h2
  text "2" at 88.54,1.023 h2
  text "1.190mm (46.85mil)" at 98.297,1.023 h2
  text "NPTH" at 117.568,1.023 h2
  text "Round" at 125.819,1.023 h2
  text "Top Layer - Bottom Layer" at 137.831,1.023 h2
  text "Pad" at 160.611,1.023 h2
  text "-" at 170.454,1.023 h2
  text "-" at 188.731,1.023 h2
  text "3" at 88.54,-3.12 h2
  text "3.200mm (125.98mil)" at 98.297,-3.12 h2
  text "NPTH" at 117.568,-3.12 h2
  text "Round" at 125.819,-3.12 h2
  text "Top Layer - Bottom Layer" at 137.831,-3.12 h2
  text "Pad" at 160.611,-3.12 h2
  text "-" at 170.454,-3.12 h2
  text "-" at 188.731,-3.12 h2
  text "863 Total" at 88.54,-7.263 h2
  text "Slot definitions :" at 79.141,-10.163 h2
  text "Routed Path Length" at 92.794,-10.163 h2
  text "= Calculated from tool start centre position to tool end centre position." at 109.707,-10.163 h2
  text "Hole Length" at 92.794,-11.821 h2
  text "= Routed Path Length + Tool Size = Slot length as defined in the PCB layout" at 103.428,-11.821 h2
  text ".Layer_Name" at -0.272,-22.558 h3
  text ".DRL" at 41.423,-22.558 h3
M20-Top Sheet Box:
  circle w0.254: c77.733,-29.279 r1.3
  region: 77.258,-22.042 61.731,-22.042 61.036,-23.818 59.826,-25.043 58.429,-23.183 58.429,-21.532 59.572,-20.135 61.008,-19.756 77.258,-19.756
  region: 63.255,-30.372 52.499,-30.372 53.492,-27.879 61.35,-27.879 61.798,-27.12 64.007,-29.668
  lines w0.254: 53.492,-27.879 62.284,-27.879 59.218,-24.341 cw(c61.021,-22.397) 61.262,-19.756 78.026,-19.756 77.264,-22.042 ; 56.806,-19.509 cw(c59.232,-20.48) 59.468,-17.877 ; 56.845,-19.477 52.499,-30.372 71.821,-30.372 ccw(c72.07,-27.637) 74.619,-28.657 ; 58.585,-23.411 64.007,-29.668 ; 58.839,-23.411 64.144,-29.533 ; 58.839,-23.157 64.144,-29.279 ; 58.937,-22.042 71.93,-22.042 ; 58.966,-23.03 64.271,-29.152 ; 59.093,-22.903 64.398,-29.025 ; 59.22,-22.776 64.525,-28.898 ; 59.347,-22.649 64.652,-28.771 ; 59.401,-20.697 64.706,-26.818 ; 59.47,-17.877 78.919,-17.877 74.62,-28.655 ; 59.474,-22.522 64.724,-28.581 ; 59.474,-22.268 64.779,-28.39 ; 59.474,-22.014 64.779,-28.136 ; 59.474,-21.125 64.779,-27.247 ; 59.601,-21.887 64.906,-28.009 ; 59.601,-21.506 64.906,-27.628 ; 60.972,-27.892 ccw(c61.077,-27.357) 61.375,-26.9 ; 62.059,-22.029 ccw(c62.033,-22.596) 61.703,-23.058 64.067,-25.787 cw(c62.264,-27.731) 62.996,-30.279 ; 68.34,-30.168 71.229,-21.788 ; 68.562,-30.118 71.432,-21.797 ; 68.689,-30.118 71.559,-21.797 ; 68.943,-30.118 71.813,-21.797 ; 69.197,-30.118 72.067,-21.797 ; 69.451,-30.118 72.321,-21.797 ; 69.705,-30.118 72.575,-21.797 ; 69.959,-30.118 72.829,-21.797 ; 70.213,-30.118 73.083,-21.797 ; 70.467,-30.118 73.337,-21.797 ; 70.676,-30.168 73.565,-21.788 ; 73.565,-22.042 77.258,-22.042 ; 76.59,-22.04 77.352,-19.754 ; 76.756,-22.042 77.518,-19.756 ; 77.01,-22.042 77.772,-19.756
  lines w0.3: -9.272,-29.258 50.728,-29.258 ; -9.272,-24.258 50.728,-24.258 ; -9.272,-19.258 50.728,-19.258 ; 30.728,-34.258 30.728,-19.258 ; 50.728,-34.258 50.728,-14.258 ; 68.34,-30.168 70.676,-30.168 ; -9.271,-34.258 -9.271,-14.258 80.728,-14.258 80.728,-34.258 -9.272,-34.258
  text "Project: '.Board_Name'" at -8.272,-17.474 h3
  text "Layer:" at -8.271,-22.558 h3
  text "Gerber:" at 31.717,-22.558 h3
  text "Variant: '.VariantName'" at -8.272,-27.558 h3
  text "'.Board_Reference'" at 31.844,-27.558 h3
  text "R" at 77.225,-30.041 h1.52
  text "Date: '.Board_Document_Date'" at -8.272,-32.558 h3
  text "Rev: '.Board_PCB_Revision'" at 31.787,-32.558 h3
M21-Bottom Sheet Box:
  circle w0.254: c-6.089,-29.279 r1.3
  region: 8.389,-30.372 19.145,-30.372 18.152,-27.879 10.294,-27.879 9.845,-27.12 7.637,-29.668
  region: -5.614,-22.042 9.913,-22.042 10.607,-23.818 11.818,-25.043 13.215,-23.183 13.215,-21.532 12.072,-20.135 10.636,-19.756 -5.614,-19.756
  lines w0.254: -6.128,-19.756 -5.366,-22.042 ; -5.874,-19.756 -5.112,-22.042 ; -5.708,-19.754 -4.946,-22.04 ; -5.62,-22.042 -6.382,-19.756 10.382,-19.756 cw(c10.622,-22.397) 12.426,-24.341 9.36,-27.879 18.152,-27.879 ; -5.614,-22.042 -1.922,-22.042 ; -2.976,-28.655 -7.276,-17.877 12.174,-17.877 ; -2.975,-28.657 ccw(c-0.426,-27.637) -0.178,-30.372 19.145,-30.372 14.799,-19.477 ; -1.922,-21.788 0.968,-30.168 ; -1.693,-21.797 1.176,-30.118 ; -1.439,-21.797 1.43,-30.118 ; -1.185,-21.797 1.684,-30.118 ; -0.931,-21.797 1.938,-30.118 ; -0.677,-21.797 2.192,-30.118 ; -0.423,-21.797 2.446,-30.118 ; -0.286,-22.042 12.707,-22.042 ; -0.169,-21.797 2.7,-30.118 ; 0.085,-21.797 2.954,-30.118 ; 0.212,-21.797 3.081,-30.118 ; 0.414,-21.788 3.304,-30.168 ; 6.738,-28.009 12.043,-21.887 ; 6.738,-27.628 12.043,-21.506 ; 6.865,-28.39 12.17,-22.268 ; 6.865,-28.136 12.17,-22.014 ; 6.865,-27.247 12.17,-21.125 ; 6.92,-28.581 12.17,-22.522 ; 6.937,-26.818 12.242,-20.697 ; 6.992,-28.771 12.297,-22.649 ; 7.119,-28.898 12.424,-22.776 ; 7.246,-29.025 12.551,-22.903 ; 7.373,-29.152 12.678,-23.03 ; 7.5,-29.533 12.805,-23.411 ; 7.5,-29.279 12.805,-23.157 ; 7.637,-29.668 13.059,-23.411 ; 8.647,-30.279 cw(c9.38,-27.731) 7.576,-25.787 9.941,-23.058 ccw(c9.611,-22.596) 9.585,-22.029 ; 10.269,-26.9 ccw(c10.566,-27.357) 10.671,-27.892 ; 12.175,-17.877 cw(c12.412,-20.48) 14.838,-19.509
  lines w0.3: 0.968,-30.168 3.304,-30.168 ; 20.728,-34.258 20.728,-14.258 ; 20.728,-29.258 80.728,-29.258 ; 20.728,-24.258 80.728,-24.258 ; 20.728,-19.258 80.728,-19.258 ; 40.728,-34.258 40.728,-19.258 ; -9.272,-34.258 80.728,-34.258 80.728,-14.258 -9.272,-14.258 -9.272,-34.258
  text "Project: '.Board_Name'" at 79.534,-17.474 h3
  text "Gerber:" at 39.545,-22.558 h3
  text "Layer:" at 79.534,-22.558 h3
  text "'.Board_Reference'" at 39.545,-27.558 h3
  text "Variant: '.VariantName'" at 79.534,-27.558 h3
  text "R" at -5.581,-30.041 h1.52
  text "Rev: '.Board_PCB_Revision'" at 39.602,-32.558 h3
  text "Date: '.Board_Document_Date'" at 79.534,-32.558 h3

## Dimensions
2,82.5 to 13.5,0 on M2-Board Dimensions
0,80.5 to 70,80.5 on M2-Board Dimensions

## Text inside footprints (layer, text, board x,y; h text height)
B1: Top Overlay "1" at 22.97,53.825 h1.5; M14-Top Assembly "3" at 22.645,50.6 h1.5; M14-Top Assembly "1" at 22.691,55.2 h1.5; M14-Top Assembly "4" at 30.195,50.55 h1.5; M14-Top Assembly "2" at 30.295,55.1 h1.5
B2: Top Overlay "1" at 39.48,53.825 h1.5; M14-Top Assembly "3" at 39.155,50.6 h1.5; M14-Top Assembly "1" at 39.201,55.2 h1.5; M14-Top Assembly "4" at 46.705,50.55 h1.5; M14-Top Assembly "2" at 46.805,55.1 h1.5
CN1: Top Overlay "A12" at 42.725,71.85 h1.3; Top Overlay "A1" at 52.175,72.9 h1.3; Top Overlay "B12" at 52.25,74.375 h1.3; M14-Top Assembly "B12" at 51.045,75.235 h0.75 r180; M14-Top Assembly "B1" at 45.125,75.21 h0.75 r180; M14-Top Assembly "A1" at 50.6,73.56 h0.75 r180; M14-Top Assembly "A12" at 45.175,73.585 h0.75 r180; M7-Top Info "PCB" at 55.85,81.915 h1 r180; M7-Top Info "EDGE" at 41.275,81.915 h1 r180
CN2: Top Overlay "1" at 9.35,79.54 h1.5; M14-Top Assembly "1" at 11,79.54 h1.5; M14-Top Assembly "4" at 18.425,79.59 h1.5
CN3: Top Overlay "B1" at 27.325,6.3 h1.3; Top Overlay "A12" at 25.45,9.7 h1.3; Top Overlay "A1" at 18.025,9.65 h1.3; Top Overlay "B12" at 15.625,6.125 h1.3; M14-Top Assembly "B12" at 18.855,7.275 h0.75; M14-Top Assembly "B1" at 24.775,7.3 h0.75; M14-Top Assembly "A1" at 19.3,8.95 h0.75; M14-Top Assembly "A12" at 24.725,8.925 h0.75; M7-Top Info "PCB" at 14.05,0.595 h1; M7-Top Info "EDGE" at 28.625,0.595 h1
CN4: Top Overlay "14" at 10.1,58.825 h1.5 r90; Top Overlay "13" at 3.85,58.725 h1.5 r90; Top Overlay "2" at 10.2,69.1 h1.5 r90; Top Overlay "1" at 3.95,69.175 h1.5 r90; M14-Top Assembly "2" at 9.095,68.715 h1 r270; M14-Top Assembly "14" at 9.07,61.29 h1 r270; M14-Top Assembly "13" at 3.42,61.315 h1 r270; M14-Top Assembly "1" at 3.37,68.615 h1 r270
CN5: Top Overlay "1" at 59.53,24.789 h1.5 r90; M14-Top Assembly "1" at 59.58,26.614 h1.5 r90
CN6: Top Overlay "1" at 10.445,42.76 h1.5 r270; M14-Top Assembly "1" at 10.42,40.86 h1.5 r270
CN7: Top Overlay "1" at 1.425,50.175 h1.5; Top Overlay "2" at 7.27,50.275 h1.5; M14-Top Assembly "2" at 5.295,51.125 h1.5 r270; M14-Top Assembly "1" at 2.795,51.025 h1.5 r270; M14-Top Assembly "38" at 5.345,5.7 h1.5 r270; M14-Top Assembly "37" at 2.77,5.7 h1.5 r270
CN8: Top Overlay "1" at 10.42,19.965 h1.5 r270; M14-Top Assembly "1" at 10.42,18.015 h1.5 r270
CN9: Top Overlay "1" at 59.555,2.88 h1.5 r90; M14-Top Assembly "1" at 59.58,4.78 h1.5 r90
CN10: Top Overlay "1" at 62.35,50.225 h1.5; Top Overlay "2" at 68.2,50.4 h1.5; M14-Top Assembly "2" at 66.255,51.125 h1.5 r270; M14-Top Assembly "1" at 63.755,51.025 h1.5 r270; M14-Top Assembly "38" at 66.305,5.7 h1.5 r270; M14-Top Assembly "37" at 63.73,5.7 h1.5 r270
CN11: Top Overlay "1" at 68.375,75.65 h1.5; M14-Top Assembly "1" at 67.275,75.905 h1.5 r90
CN12: Top Overlay "1" at 1.3,75.625 h1.5; M14-Top Assembly "1" at 3.775,75.905 h1.5 r90
D1: M14-Top Assembly "K" at 46.975,63.375 h0.45 r180
D2: M14-Top Assembly "K" at 46.975,58.975 h0.45 r180
D3: M14-Top Assembly "K" at 46.975,65.225 h0.45 r180
D4: M14-Top Assembly "K" at 46.975,61.275 h0.45 r180
JP1: Top Overlay "1" at 22.775,79.5 h1.5; M14-Top Assembly "1" at 24.475,79.515 h1.5
JP2: Top Overlay "1" at 35.75,40.75 h1.5; M14-Top Assembly "1" at 34.455,41.75 h1.5 r180
JP5: Top Overlay "1" at 60.55,57.325 h1.5; Top Overlay "2" at 54.475,57.3 h1.5; M14-Top Assembly "9" at 59.58,67.765 h1.5 r90; M14-Top Assembly "10" at 57.055,67.375 h1.5 r90; M14-Top Assembly "2" at 57.08,57.5 h1.5 r90; M14-Top Assembly "1" at 59.58,57.6 h1.5 r90
JP6: Top Overlay "1" at 42.285,40.69 h1.5; M14-Top Assembly "1" at 41.025,41.75 h1.5 r180
LD1: Top Overlay "G" at 60.575,78.05 h1.5; Top Overlay "1" at 63.125,75.825 h1.5; Top Overlay "R" at 61.975,78.075 h1.5; M14-Top Assembly "G" at 61.47,79.04 h1.5 r180; M14-Top Assembly "R" at 62.87,79.04 h1.5 r180
LD2: M14-Top Assembly "K" at 52.8,56.65 h0.75 r90
LD3: M14-Top Assembly "K" at 61.85,70.1 h0.75
LD4: M14-Top Assembly "K" at 35.175,80.8 h0.75 r180
LD6: M14-Top Assembly "K" at 32.875,3.6 h0.75 r90
LD7: Top Overlay "1" at 58.1,75.775 h1.5; Top Overlay "G" at 55.525,78.075 h1.5; Top Overlay "R" at 56.925,78.125 h1.5; M14-Top Assembly "G" at 56.425,79.05 h1.5 r180; M14-Top Assembly "R" at 57.825,79.05 h1.5 r180
U2: Top Overlay "1" at 47.95,70 h1.3; M14-Top Assembly "1" at 47.725,70.25 h0.5 r180; M14-Top Assembly "2" at 47.25,70.25 h0.5 r180; M14-Top Assembly "3" at 46.75,70.25 h0.5 r180; M14-Top Assembly "4" at 46.76,69.067 h0.5 r180; M14-Top Assembly "5" at 47.25,69.075 h0.5 r180; M14-Top Assembly "6" at 47.75,69.075 h0.5 r180
U3: M14-Top Assembly "K" at 53.7,72.225 h1 r270
U4: Top Overlay "1" at 39.517,77.025 h1.5
U5: M14-Top Assembly "A1" at 25.3,63.5 h0.75 r90
U9: M14-Top Assembly "K" at 33.75,55.725 h0.45
U10: M14-Top Assembly "K" at 49.545,50.79 h0.45 r90
U11: Top Overlay "1" at 18.205,47.215 h1.5 r270; M14-Top Assembly "4" at 24.225,43.955 h1.5 r270; M14-Top Assembly "1" at 18.5,46.13 h1.5 r270; M14-Top Assembly "2" at 18.475,43.98 h1.5 r270; M14-Top Assembly "3" at 18.45,41.68 h1.5 r270
U12: Top Overlay "1" at 31.75,47.3 h1.5 r90
U13: Top Overlay "1" at 39.05,30.325 h1.5; M14-Top Assembly "1" at 38.95,31 h1.2 r180; M14-Top Assembly "16" at 31.725,30.975 h1.2 r180; M14-Top Assembly "17" at 28.05,28.375 h1.2 r270; M14-Top Assembly "32" at 28.1,20.9 h1.2 r270; M14-Top Assembly "33" at 30.7,17.175 h1.2; M14-Top Assembly "48" at 38.15,17.2 h1.2; M14-Top Assembly "49" at 41.925,19.775 h1.2 r90; M14-Top Assembly "64" at 41.925,27.275 h1.2 r90
U14: M14-Top Assembly "2" at 28.55,8.25 h0.75 r270; M14-Top Assembly "1" at 28.55,8.25 h0.75 r270
U17: Top Overlay "1" at 23.95,15.7 h1.5; M14-Top Assembly "2" at 22.65,15.65 h0.75 r180; M14-Top Assembly "3" at 21.72,15.655 h0.75 r180; M14-Top Assembly "1" at 23.55,15.65 h0.75 r180; M14-Top Assembly "6" at 23.6,13.3 h0.75 r180; M14-Top Assembly "5" at 22.65,13.3 h0.75 r180; M14-Top Assembly "4" at 21.72,13.315 h0.75 r180
U19: Top Overlay "1" at 12.275,73.35 h1.3 r270; M14-Top Assembly "8" at 14.45,72.625 h0.5; M14-Top Assembly "5" at 14.45,71.15 h0.5; M14-Top Assembly "4" at 12.825,71.15 h0.5; M14-Top Assembly "1" at 12.85,72.625 h0.5
X1: M14-Top Assembly "1" at 28.875,58.25 h0.5; M14-Top Assembly "2" at 30.125,58.25 h0.5; M14-Top Assembly "3" at 30.125,59.225 h0.5; M14-Top Assembly "4" at 28.85,59.225 h0.5
X3: M14-Top Assembly "1" at 34.45,35.34 h0.5 r180; M14-Top Assembly "2" at 33.2,35.34 h0.5 r180; M14-Top Assembly "3" at 33.2,34.365 h0.5 r180; M14-Top Assembly "4" at 34.475,34.365 h0.5 r180